# Altium PCB TeensyESC.PcbDoc (part 1 of 2)
Units mil, origin at the board's own origin, x right, y up, seen from the top; angles counter-clockwise.
Board outline 6000 x 4000 mil, 2 copper layers (Top Layer, Bottom Layer); 113 components, 117 nets, 556 pads, 0 vias.
Unrouted connection lines stored in the file: 293.
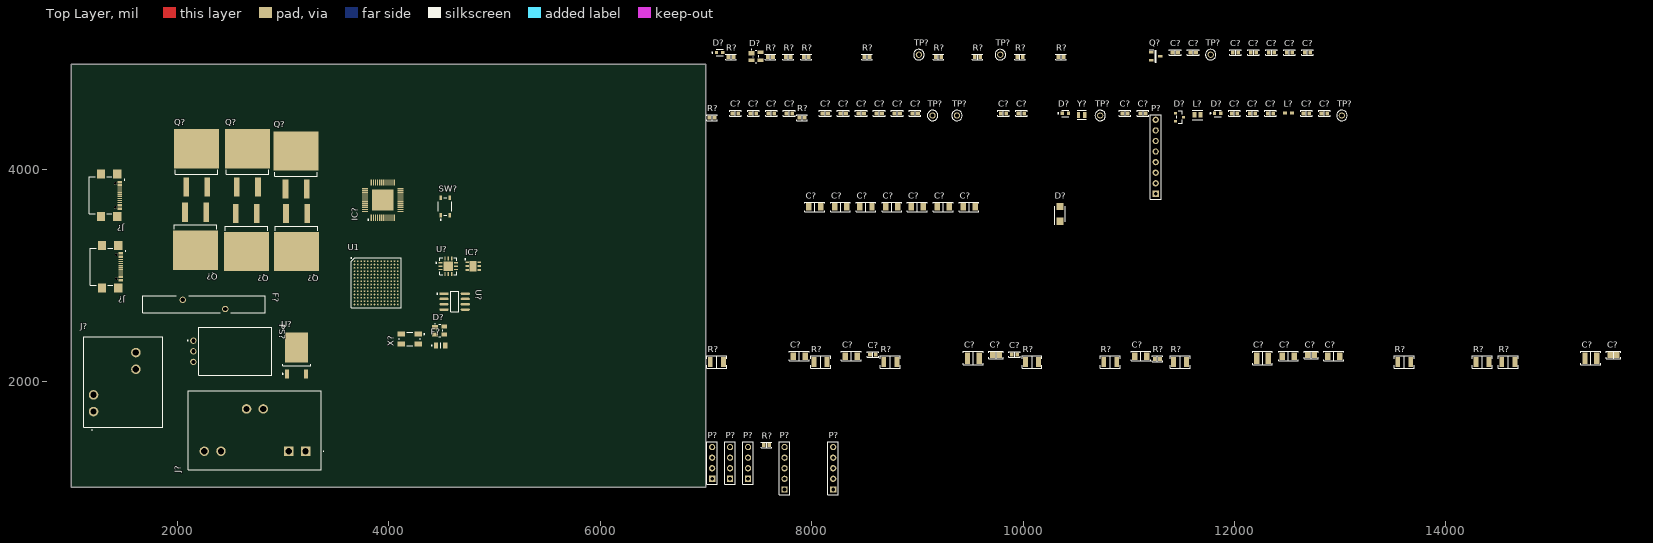
[diagram p0: Top Layer view]
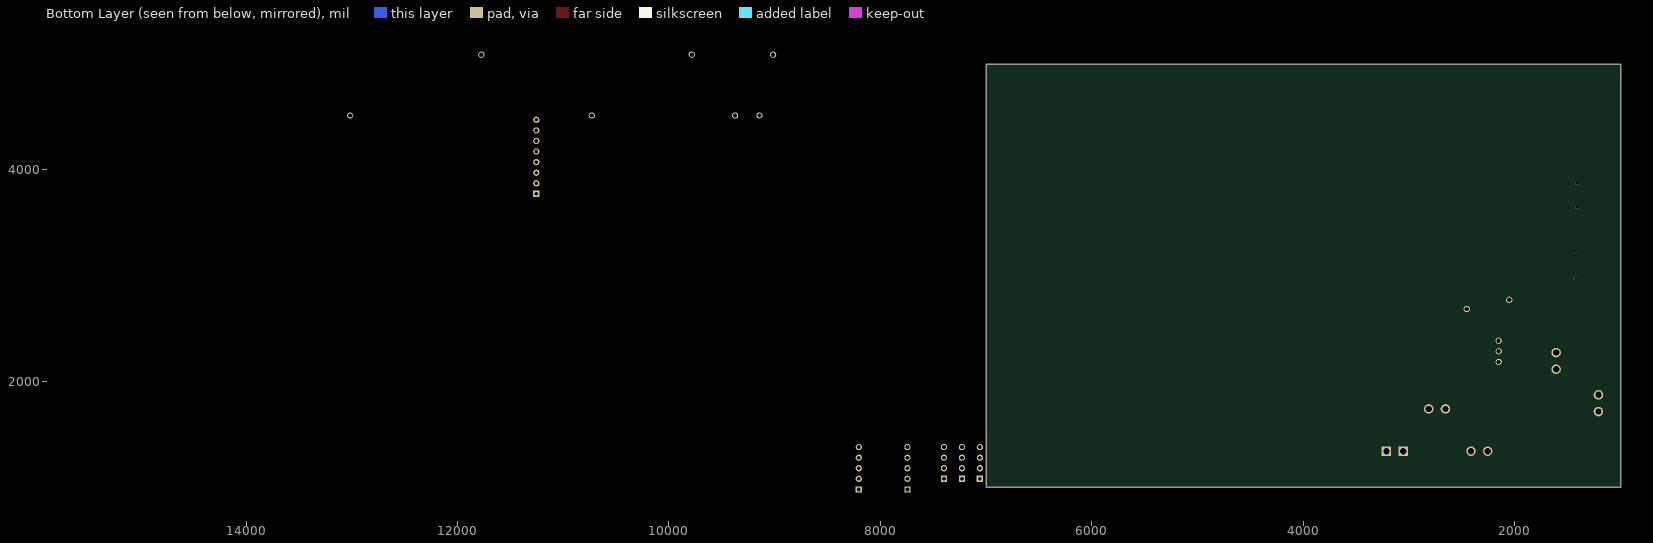
[diagram p1: Bottom Layer view, seen from below]

## Layer stack, top to bottom
Top Solder: solder mask 0.4, Solder Resist, Dk 3.5
Top Layer: signal copper 1.4
Dielectric 1: dielectric 12.6, FR-4, Dk 4.8
Bottom Layer: signal copper 1.4
Bottom Solder: solder mask 0.4, Solder Resist, Dk 3.5

## Board outline
1000,1000 7000,1000 7000,5000 1000,5000

## Design rules (kind name [scope] priority, off if disabled: settings)
Clearance [All] p1: gap=10 ignorepadtopadclearanceinfootprint=FALSE except(0: Arc-Hole Track-Hole SMDPad-Hole THPad-Hole Via-Hole Fill-Hole Poly-Hole Region-Hole Text-Hole)
PolygonConnect [All] p1: connectstyle=Relief reliefconductorwidth=10 reliefentries=4 polygonreliefangle="90 Angle" airgapwidth=10
RoomDefinition U_USBIO [InComponentClass('U_USBIO')] p1: confinementstyle=ConfineIn formatcopy=TRUE lockcomponents=FALSE outline 7045,1120 15660,1120 15660,5250 7045,5250
RoomDefinition U_Gating [InComponentClass('U_Gating')] p2: confinementstyle=ConfineIn formatcopy=TRUE lockcomponents=FALSE outline 7045,1400 15660,1400 15660,5250 7045,5250
RoomDefinition U_MCUCustom [InComponentClass('U_MCUCustom')] p3: confinementstyle=ConfineIn formatcopy=TRUE lockcomponents=FALSE outline 7045,960 15660,960 15660,5250 7045,5250
RoomDefinition U_HVin [InComponentClass('U_HVin')] p4: confinementstyle=ConfineIn formatcopy=TRUE lockcomponents=FALSE outline 7045,1120 15660,1120 15660,5250 7045,5250
RoomDefinition U_EXTIO [InComponentClass('U_EXTIO')] p5: confinementstyle=ConfineIn formatcopy=TRUE lockcomponents=FALSE outline 7000,918.9 14695,918.9 14695,5208.9 7000,5208.9
RoutingVias [All] p1: holewidth=28 width=50 viastyle="Through Hole" minholewidth=28 minwidth=50 maxholewidth=28 maxwidth=50
SolderMaskExpansion [All] p1: expansion=4 istentingtop=FALSE
Width [All] p1: maxlimit=10 minlimit=10 preferedwidth=10
30 further rules are at their usual default settings.

## Classes and differential pairs
component class U_USBIO: C? D? F? IC? J? Q? R? TP? U?
component class U_MCUCustom: C? D? IC? L? P? R? SW? TP? U1 X? Y?
component class U_HVin: C? D? F? J? PS? U?
component class U_Gating: C? IC? Q? R?
component class U_EXTIO: P? R? U?

## Components (designator, comment, footprint, x,y, rotation, side; value= is the part's Value field where it differs from the comment)
C? "100 µF" "CAP 1206_3216 - 0.8MM" 8030,3650 r0 top
C? "10 µF" "CAP 1206_3216 - 0.8MM" 9000,3650 r0 top
C? "1 µF" "CAP 1206_3216 - 0.8MM" 9245,3650 r0 top
C? "0.1 µF" "CAP 0603_1608" 9920,2255 r0 top
C? "10 µF" "CAP 1206_3216 - 0.8MM" 8275,3650 r0 top
C? "0.1 µF" "CAP 1206_3216 - 0.8MM" 8515,3650 r0 top
C? "0.22 µF" "CAP 0603_1608" 12680,4535 r0 top
C? "4.7 µF" "CAP 0603_1608" 7620,4535 r0 top
C? "10 µF" "CAP 0603_1608" 7450,4535 r0 top
C? "1 µF" "CAP 1206_3216 - 0.8MM" 9490,3650 r0 top
C? "100 µF" "CAP 1206_3216 - 0.8MM" 8760,3650 r0 top
C? "1µF" "CAP 1210_3225 - 2.8MM" 15370,2220 r0 top
C? "0.022 µF" "CAP 1206_3216 - 0.8MM" 11115,2240 r0 top
C? "1µF" "CAP 1210_3225 - 2.8MM" 12265,2220 r0 top
C? "0.1 µF" "CAP 1206_3216 - 0.8MM" 12510,2240 r0 top
C? "2.2µF" "CAP 1206_3216 - 1.2MM" 7885,2240 r0 top
C? "0.1 µF" "CAP 1206_3216 - 0.8MM" 12940,2240 r0 top
C? "0.1 µF" "CAP 0603_1608" 8580,2255 r0 top
C? "2.2 µF" "CAP 0805_2012" 15585,2250 r0 top
C? "1µF" "CAP 1210_3225 - 2.8MM" 9530,2220 r0 top
C? "0.1 µF" "CAP 1206_3216 - 0.8MM" 8375,2240 r0 top
C? "2.2 µF" "CAP 0805_2012" 9745,2250 r0 top
C? "2.2 µF" "CAP 0805_2012" 12725,2250 r0 top
C? "9 pF" "CAP 0603_1608" 11135,4535 r0 top
C? "0.22 µF" "CAP 0603_1608" 12350,5110 r0 top
C? "18pF" "CAP 0603_1608" 9815,4535 r0 top
C? "0.22 µF" "CAP 0603_1608" 8810,4535 r0 top
C? "18pF" "CAP 0603_1608" 8980,4535 r0 top
C? "4.7 µF" "CAP 0603_1608" 12690,5110 r0 top
C? "0.22 µF" "CAP 0603_1608" 12180,5110 r0 top
C? "0.22 µF" "CAP 0603_1608" 12010,5110 r0 top
C? "2.2 µF" "CAP 0603_1608" 11440,5110 r0 top
C? "10000 pF" "CAP 0603_1608" 12520,5110 r0 top
C? "2.2 µF" "CAP 0603_1608" 11610,5110 r0 top
C? "4.7 µF" "CAP 0603_1608" 8300,4535 r0 top
C? "0.22 µF" "CAP 0603_1608" 7790,4535 r0 top
C? "10 µF" "CAP 0603_1608" 12850,4535 r0 top
C? "0.22 µF" "CAP 0603_1608" 8470,4535 r0 top
C? "0.22 µF" "CAP 0603_1608" 12000,4535 r0 top
C? "9 pF" "CAP 0603_1608" 9985,4535 r0 top
C? "0.22 µF" "CAP 0603_1608" 8130,4535 r0 top
C? "10 µF" "CAP 0603_1608" 12170,4535 r0 top
C? "0.22 µF" "CAP 0603_1608" 10965,4535 r0 top
C? "4.7 µF" "CAP 0603_1608" 12340,4535 r0 top
C? "10000 pF" "CAP 0603_1608" 7280,4535 r0 top
C? "4.7 µF" "CAP 0603_1608" 8640,4535 r0 top
D? "BAT54C,215" FP-SOT23-MFG 11480,4500 r0 top value=10pF
D? "LTST-C191KGKT" FP-LTST-C191KGKT-MFG 11840,4535 r0 top
D? "RB050LAM-30TFTR" SODFL4725X95N 10350,3585 r90 top
D? "LTST-C191KGKT" FP-LTST-C191KGKT-MFG 10400,4535 r0 top
D? "LTST-C191KGKT" FP-LTST-C191KGKT-MFG 7130,5110 r0 top
D? "SP0503BAHTG" LFUS-SOT143-4_V 4483.31,2482.4 r0 top
D? "SP0503BAHTG" LFUS-SOT143-4_V 7475,5075 r0 top
F? "0ZRM0375FF1A" 0ZRM0375FF1A 2053.43,2771.61 r0 top
F? "0805L110SLYR" 0805L075SLYR 4492.31,2339.03 r0 top
IC? "TMC6200-TA" QFP50P900X900X120-49N 3945,3715 r90 top
IC? "NCP692MN33T2G" SON95P300X300X100-7N 4800,3090 r0 top
J? "0399100103" 0399100103 3214.8,1340 r180 top
J? "0399100102" 0399100102 1210,1715 r90 top
J? "USB4110-GF-A_REVB" GCT_USB4110-GF-A_REVB 1415,3760 r270 top
J? "USB4110-GF-A_REVB" GCT_USB4110-GF-A_REVB 1425,3085 r270 top
L? "BLM18AG121SN1D" MURA-BLM18-F-H1-CHIP-2_V 12510,4540 r0 top
L? "LQM21PN4R7MGRD" FP-LQM21PH_G0-IPC_C 11650,4520 r0 top
P? "Header 4" HDR1X4 7230,1078.9 r90 top
P? "Header 5" HDR1X5 7745,978.9 r90 top
P? "Header 4" HDR1X4 7400,1078.9 r90 top
P? "Header 8" HDR1X8 11255,3773.9 r90 top
P? "Header 5" HDR1X5 8205,978.9 r90 top
P? "Header 4" HDR1X4 7060,1078.9 r90 top
PS? "V7812W-500R" V78121000R 2510,2285 r0 top
Q? "IPB031N08N5ATMA1" FP-PG-TO263-3-MFG 2175,3372.87 r180 top
Q? "IPB031N08N5ATMA1" FP-PG-TO263-3-MFG 2185,4067.13 r0 top
Q? "IPB031N08N5ATMA1" FP-PG-TO263-3-MFG 2655,3360 r180 top
Q? "IPB031N08N5ATMA1" FP-PG-TO263-3-MFG 3130,3360 r180 top
Q? "DMP3125L-7" SOT96P240X110-3N 11255,5075 r0 top
Q? "IPB031N08N5ATMA1" FP-PG-TO263-3-MFG 2665,4067.13 r0 top
Q? "IPB031N08N5ATMA1" FP-PG-TO263-3-MFG 3125,4047.13 r0 top
R? "1 Ohms" "RES 1210_3225" 14590,2183.9 r0 top
R? "1 Ohms" "RES 1210_3225" 10085,2183.9 r0 top
R? "10 Ohms" "RES 1210_3225" 14345,2183.9 r0 top
R? "1 Ohms" "RES 1210_3225" 11485,2183.9 r0 top
R? "10 Ohms" "RES 1210_3225" 10825,2183.9 r0 top
R? "120 Ohms" "RES 0603_1608" 7575,1398.9 r0 top
R? "10 Ohms" "RES 0603_1608" 11270,2213.9 r0 top
R? "1 Ohms" "RES 1210_3225" 13605,2183.9 r0 top
R? "10 Ohms" "RES 1210_3225" 8085,2183.9 r0 top
R? "1 Ohms" "RES 1210_3225" 7105,2183.9 r0 top
R? "100 kOhms" "RES 0603_1608" 7780,5068.9 r0 top
R? "56 kOhms" "RES 0603_1608" 7950,5068.9 r0 top
R? "5.1 kOhms" "RES 0603_1608" 9970,5068.9 r0 top
R? "100 kOhms" "RES 0603_1608" 9200,5068.9 r0 top
R? "5.1 kOhms" "RES 0603_1608" 10360,5068.9 r0 top
R? "16 kOhms" "RES 0603_1608" 8525,5068.9 r0 top
R? "100 kOhms" "RES 0603_1608" 7910,4493.9 r0 top
R? "2.2 MOhms" "RES 0603_1608" 7060,4493.9 r0 top
R? "1 Ohms" "RES 1210_3225" 8745,2183.9 r0 top
R? "56 kOhms" "RES 0603_1608" 7610,5068.9 r0 top
R? "16 kOhms" "RES 0603_1608" 7240,5068.9 r0 top
R? "100 kOhms" "RES 0603_1608" 9570,5068.9 r0 top
SW? "PTS810 SJG 250 SMTR LFS" FP-PTS810_SJG_250_SMTR_LF-MFG 4535,3655 r90 top
TP? "5003" KSTN-5003 9145,4515 r0 top
TP? "5003" KSTN-5003 10730,4515 r0 top
TP? "5003" KSTN-5003 13015,4515 r0 top
TP? "5003" KSTN-5003 9375,4515 r0 top
TP? "5003" KSTN-5003 9785,5090 r0 top
TP? "5003" KSTN-5003 11775,5090 r0 top
TP? "5003" KSTN-5003 9015,5090 r0 top
U1 "MIMXRT1062DVJ6B" BGA196C80P14X14_1200X1200X152 3882.76,2932.24 r0 top
U? "TJA1050T/CM,118" FP-SOT96-1-IPC_A 4625,2755 r0 top
U? "LP38690DT-5.0/NOPB" NDP0003B_M 3130.14,2243.9 r90 top
U? "MAX1563ETC+" FP-T1244-4-MFG 4565,3090 r0 top
X? "ABM3B-24.000MHZ-B2-T" ABRA-ABM3B-4_V 4200,2400 r180 top
Y? "ABS06-32.768KHZ-9-1-T" FP-ABS06-MFG 10555,4520 r0 top

## Footprints (in the part's own frame and the unit in brackets; to place one, negate y for a bottom-side part, rotate by r counter-clockwise, add the part's x,y. Pads: shape width x height; smd on the part's side, far side on the other; paste and mask are expansions set on the pad)
0ZRM0375FF1A [mm]
  round 1.515 hole 1.01: 1(0,0) 2(10.2,-2.2)
  silkscreen extent -9.65,-3.15 19.85,0.95, body extent -9.65,-3.15 19.85,0.95, height 34.1
0805L075SLYR [mm]
  rect 1x1.5 smd: 1(-1.1,0) 2(1.1,0)
  silkscreen extent -2.2,-0.67 0,0.67, body extent -1.05,-0.68 1.05,0.68, height 0.75
0399100102 [mm]
  round 2.28 hole 1.52: 1(0,0) 2(4.01,0) 3(10.16,-10.16) 4(14.17,-10.16)
  silkscreen extent -4.51,-16.61 17.99,2.39, body extent -3.82,-16.61 17.99,2.39, height 29.8
0399100103 [mm]
  rect 2.28x2.28 hole 1.52: A1(0,0) B1(4.01,0)
  round 2.28 hole 1.52: A2(10.155,-10.16) A3(20.315,0) B2(14.17,-10.16) B3(24.325,0)
  silkscreen extent -4.4,-14.58 28.21,4.42, body extent -3.79,-14.58 28.21,4.42, height 30.1
ABRA-ABM3B-4_V [mm] "SMD, 4-Leads, Body 5x3.2mm"
  rect 1.8x1.2 smd: 1(-2,-1.2) 2(2,-1.2) 3(2,1.2) 4(-2,1.2)
  silkscreen extent -3.58,-1.6 2.5,1.6, body extent -2.5,-1.59 2.5,1.59, height 1.13
BGA196C80P14X14_1200X1200X152 [mm]
  round 0.394 smd: A1(-5.2,5.2) A2(-4.4,5.2) A3(-3.6,5.2) A4(-2.8,5.2) A5(-2,5.2) A6(-1.2,5.2) A7(-0.4,5.2) A8(0.4,5.2) A9(1.2,5.2) A10(2,5.2) A11(2.8,5.2) A12(3.6,5.2) A13(4.4,5.2) A14(5.2,5.2) B1(-5.2,4.4) B2(-4.4,4.4) B3(-3.6,4.4) B4(-2.8,4.4) B5(-2,4.4) B6(-1.2,4.4) B7(-0.4,4.4) B8(0.4,4.4) B9(1.2,4.4) B10(2,4.4) B11(2.8,4.4) B12(3.6,4.4) B13(4.4,4.4) B14(5.2,4.4) C1(-5.2,3.6) C2(-4.4,3.6) C3(-3.6,3.6) C4(-2.8,3.6) C5(-2,3.6) C6(-1.2,3.6) C7(-0.4,3.6) C8(0.4,3.6) C9(1.2,3.6) C10(2,3.6) C11(2.8,3.6) C12(3.6,3.6) C13(4.4,3.6) C14(5.2,3.6) D1(-5.2,2.8) D2(-4.4,2.8) D3(-3.6,2.8) D4(-2.8,2.8) D5(-2,2.8) D6(-1.2,2.8) D7(-0.4,2.8) D8(0.4,2.8) D9(1.2,2.8) D10(2,2.8) D11(2.8,2.8) D12(3.6,2.8) D13(4.4,2.8) D14(5.2,2.8) E1(-5.2,2) E2(-4.4,2) E3(-3.6,2) E4(-2.8,2) E5(-2,2) E6(-1.2,2) E7(-0.4,2) E8(0.4,2) E9(1.2,2) E10(2,2) E11(2.8,2) E12(3.6,2) E13(4.4,2) E14(5.2,2) F1(-5.2,1.2) F2(-4.4,1.2) F3(-3.6,1.2) F4(-2.8,1.2) F5(-2,1.2) F6(-1.2,1.2) F7(-0.4,1.2) F8(0.4,1.2) F9(1.2,1.2) F10(2,1.2) F11(2.8,1.2) F12(3.6,1.2) F13(4.4,1.2) F14(5.2,1.2) G1(-5.2,0.4) G2(-4.4,0.4) G3(-3.6,0.4) G4(-2.8,0.4) G5(-2,0.4) G6(-1.2,0.4) G7(-0.4,0.4) G8(0.4,0.4) G9(1.2,0.4) G10(2,0.4) G11(2.8,0.4) G12(3.6,0.4) G13(4.4,0.4) G14(5.2,0.4) H1(-5.2,-0.4) H2(-4.4,-0.4) H3(-3.6,-0.4) H4(-2.8,-0.4) H5(-2,-0.4) H6(-1.2,-0.4) H7(-0.4,-0.4) H8(0.4,-0.4) H9(1.2,-0.4) H10(2,-0.4) H11(2.8,-0.4) H12(3.6,-0.4) H13(4.4,-0.4) H14(5.2,-0.4) J1(-5.2,-1.2) J2(-4.4,-1.2) J3(-3.6,-1.2) J4(-2.8,-1.2) J5(-2,-1.2) J6(-1.2,-1.2) J7(-0.4,-1.2) J8(0.4,-1.2) J9(1.2,-1.2) J10(2,-1.2) J11(2.8,-1.2) J12(3.6,-1.2) J13(4.4,-1.2) J14(5.2,-1.2) K1(-5.2,-2) K2(-4.4,-2) K3(-3.6,-2) K4(-2.8,-2) K5(-2,-2) K6(-1.2,-2) K7(-0.4,-2) K8(0.4,-2) K9(1.2,-2) K10(2,-2) K11(2.8,-2) K12(3.6,-2) K13(4.4,-2) K14(5.2,-2) L1(-5.2,-2.8) L2(-4.4,-2.8) L3(-3.6,-2.8) L4(-2.8,-2.8) L5(-2,-2.8) L6(-1.2,-2.8) L7(-0.4,-2.8) L8(0.4,-2.8) L9(1.2,-2.8) L10(2,-2.8) L11(2.8,-2.8) L12(3.6,-2.8) L13(4.4,-2.8) L14(5.2,-2.8) M1(-5.2,-3.6) M2(-4.4,-3.6) M3(-3.6,-3.6) M4(-2.8,-3.6) M5(-2,-3.6) M6(-1.2,-3.6) M7(-0.4,-3.6) M8(0.4,-3.6) M9(1.2,-3.6) M10(2,-3.6) M11(2.8,-3.6) M12(3.6,-3.6) M13(4.4,-3.6) M14(5.2,-3.6) N1(-5.2,-4.4) N2(-4.4,-4.4) N3(-3.6,-4.4) N4(-2.8,-4.4) N5(-2,-4.4) N6(-1.2,-4.4) N7(-0.4,-4.4) N8(0.4,-4.4) N9(1.2,-4.4) N10(2,-4.4) N11(2.8,-4.4) N12(3.6,-4.4) N13(4.4,-4.4) N14(5.2,-4.4) P1(-5.2,-5.2) P2(-4.4,-5.2) P3(-3.6,-5.2) P4(-2.8,-5.2) P5(-2,-5.2) P6(-1.2,-5.2) P7(-0.4,-5.2) P8(0.4,-5.2) P9(1.2,-5.2) P10(2,-5.2) P11(2.8,-5.2) P12(3.6,-5.2) P13(4.4,-5.2) P14(5.2,-5.2)
  silkscreen extent -6.1,-6 6,6.1, body extent -6,-6 6,6, height 1.52
"CAP 0603_1608" [mm] "Chip Capacitor, 2-Leads, Body 1.60x0.80mm, IPC Medium Density"
  rect 0.9x1 smd: 1(-0.675,0) 2(0.675,0)
  silkscreen extent -1.4,-0.7 1.4,0.7, body extent -0.8,-0.41 0.8,0.41, height 0.82
"CAP 0805_2012" [mm] "Chip Capacitor, 2-Leads, Body 2.00x1.20mm, IPC Medium Density"
  rect 1.3x1.4 smd: 1(-0.8,0) 2(0.8,0)
  silkscreen extent -1.7,-0.9 1.7,0.9, body extent -1,-0.64 1,0.64, height 1.26
"CAP 1206_3216 - 0.8MM" [mm] "Chip Capacitor, 2-Leads, Body 3.25x1.60mm, IPC Medium Density"
  rect 1.3x1.8 smd: 1(-1.45,0) 2(1.45,0)
  silkscreen extent -2.37,-1.12 2.37,1.12, body extent -1.6,-0.8 1.6,0.8, height 0.8
"CAP 1206_3216 - 1.2MM" [mm] "Chip Capacitor, 2-Leads, Body 3.25x1.60mm, IPC Medium Density"
  rect 1.3x1.8 smd: 1(-1.45,0) 2(1.45,0)
  silkscreen extent -2.37,-1.12 2.37,1.12, body extent -1.6,-0.8 1.6,0.8, height 1.2
"CAP 1210_3225 - 2.8MM" [mm] "Chip Capacitor, 2-Leads, Body 3.20x2.50mm, IPC Medium Density"
  rect 1.3x2.7 smd: 1(-1.4,0) 2(1.4,0)
  silkscreen extent -2.37,-1.63 2.37,1.63, body extent -1.6,-1.25 1.6,1.25, height 2.8
FP-ABS06-MFG [mm]
  rect 0.75x1.4 smd paste+0 mask+0: 1(-0.725,0) 2(0.725,0)
  silkscreen extent -1.07,-1.07 1.07,1.07, body extent -1.2,-0.8 1.2,0.8, height 0.25
FP-LQM21PH_G0-IPC_C [mil]
  rect 39.61x51.5 smd paste+0 mask+0: 1(-28.59,0) 2(28.59,0)
  silkscreen extent -48,-43 48,43, body extent -52,-31 52,31, height 10
FP-LTST-C191KGKT-MFG [mm]
  rect 0.8x0.8 smd paste+0 mask+0: 1(-0.75,0) 2(0.75,0)
  silkscreen extent -1.82,-0.77 0.85,0.77, body extent -1.25,-0.55 1.25,0.55, height 0.25
FP-PG-TO263-3-MFG [mm]
  rect 1.35x4.6 smd paste-1000 mask+0: 1(-2.54,-5.775) 3(2.54,-5.775)
  rect 10.8x9.4 smd paste-1000 mask+0: 4(0,3.375)
  silkscreen extent -5.1,-2.73 5.1,-1.7, body extent -5.5,-8.18 5.5,8.18, height 0.25
FP-PTS810_SJG_250_SMTR_LF-MFG [mm]
  rect 1.05x0.65 smd paste+0 mask+0: 1(-2.075,1.075) 2(2.075,1.075) 3(-2.075,-1.075) 4(2.075,-1.075)
  silkscreen extent -3.32,-1.6 2.1,1.6, body extent -2.7,-1.7 2.7,1.7, height 0.25
FP-SOT23-MFG [mm]
  rect 0.7x0.6 smd paste-1000 mask+0: 1(-1,0.95) 2(-1,-0.95) 3(1,0)
  silkscreen extent -0.7,-1.5 0.7,1.5, body extent -1.5,-1.65 1.5,1.65, height 0.25
FP-SOT96-1-IPC_A [mil]
  rect 86.79x23.94 smd paste+0 mask+0: 1(-100.43,75)
  rrect100% 86.79x23.94 smd paste+0 mask+0: 2(-100.43,25) 3(-100.43,-25) 4(-100.43,-75) 5(100.43,-75) 6(100.43,-25) 7(100.43,25) 8(100.43,75)
  silkscreen extent -170,-96 37,96, body extent -164,-116 164,116, height 10
FP-T1244-4-MFG [mm]
  rect 0.95x0.35 smd paste+0 mask+0: 1(-1.84,0.8) 2(-1.84,0) 3(-1.84,-0.8) 7(1.84,-0.8) 8(1.84,0) 9(1.84,0.8)
  rect 0.35x0.95 smd paste+0 mask+0: 4(-0.8,-1.84) 5(0,-1.84) 6(0.8,-1.84) 10(0.8,1.84) 11(0,1.84) 12(-0.8,1.84)
  rect 2.23x2.23 smd paste+0 mask+0: 13(0,0)
  silkscreen extent -3.05,-2.05 2.05,2.05, body extent -2.41,-2.41 2.41,2.41, height 0.25
GCT_USB4110-GF-A_REVB [mm]
  rect 0.6x1.15 smd: A1/B12(-3.2,1.075) A4/B9(-2.4,1.075) B1/A12(3.2,1.075) B4/A9(2.4,1.075)
  rect 0.3x1.15 smd: A5(-1.25,1.075) A6(-0.25,1.075) A7(0.25,1.075) A8(1.25,1.075) B5(1.75,1.075) B6(0.75,1.075) B7(-0.75,1.075) B8(-1.75,1.075)
  rect 2.18x2 smd: S1(-5.11,0.5) S2(5.11,0.5) S3(-5.11,-3.43) S4(5.11,-3.43)
  round 0.65 hole 0.65 unplated: ""(-2.89,0) ""(2.89,0)
  silkscreen extent -4.47,-6.28 4.47,2.33, body extent -5.65,-6.28 5.65,1.42, height 3.26
HDR1X4 [mm] "Connector; Header; 4 Position"
  rect 1.5x1.5 hole 0.9: 1(0,0)
  round 1.5 hole 0.9: 2(2.54,0) 3(5.08,0) 4(7.62,0)
  silkscreen extent -1.27,-1.27 8.89,1.27
HDR1X5 [mm] "Connector; Header; 5 Position"
  rect 1.5x1.5 hole 0.9: 1(0,0)
  round 1.5 hole 0.9: 2(2.54,0) 3(5.08,0) 4(7.62,0) 5(10.16,0)
  silkscreen extent -1.27,-1.27 11.43,1.27
HDR1X8 [mm] "Connector; Header; 8 Position"
  rect 1.5x1.5 hole 0.9: 1(0,0)
  round 1.5 hole 0.9: 2(2.54,0) 3(5.08,0) 4(7.62,0) 5(10.16,0) 6(12.7,0) 7(15.24,0) 8(17.78,0)
  silkscreen extent -1.27,-1.27 19.05,1.27
KSTN-5003 [mm] "Test Point, Through Hole, Dia 2.54mm"
  round 1.5 hole 1: 1(0,0)
  silkscreen extent -1.27,-1.27 1.27,1.27, body extent -1.27,-1.27 1.27,1.27, height 4.57
LFUS-SOT143-4_V [mm] "SOT143, 4-Leads, Body 3.04x1.4mm, Pitch 1.90mm"
  rect 1.4x1.1 smd: 1(-1.1,0.75)
  rect 1.4x0.9 smd: 2(-1.1,-0.95) 3(1.1,-0.95) 4(1.1,0.95)
  silkscreen extent -1.15,-1.5 0.7,1.65, body extent -0.7,-1.52 0.7,1.52, height 1.22
MURA-BLM18-F-H1-CHIP-2_V [mm] "Chip Ferrite Bead, 2-Leads, Body 1.6x0.8mm, Height 0.95mm, Flow"
  rect 0.95x0.7 smd: 1(-0.825,0) 2(0.825,0)
  body extent -0.87,-0.48 0.87,0.48, height 0.95
NDP0003B_M [mm] "D-PAK, 4-Leads, Body 6.1x6.6mm, Pitch 2.29mm, Lead Span 9.7mm, IPC Low Density"
  rrect10% 2.2x1 smd: 1(-4.4,2.28) 3(-4.4,-2.28)
  rrect2% 7.2x5.55 smd: 4(1.9,0)
  silkscreen extent -4.52,-3.35 -2.1,3.45, body extent -2.45,-3.35 3.75,3.35, height 2.38
QFP50P900X900X120-49N [mm]
  rect 1.475x0.3 smd: 1(-4.238,2.75) 2(-4.238,2.25) 3(-4.238,1.75) 4(-4.238,1.25) 5(-4.238,0.75) 6(-4.238,0.25) 7(-4.238,-0.25) 8(-4.238,-0.75) 9(-4.238,-1.25) 10(-4.238,-1.75) 11(-4.238,-2.25) 12(-4.238,-2.75) 25(4.238,-2.75) 26(4.238,-2.25) 27(4.238,-1.75) 28(4.238,-1.25) 29(4.238,-0.75) 30(4.238,-0.25) 31(4.238,0.25) 32(4.238,0.75) 33(4.238,1.25) 34(4.238,1.75) 35(4.238,2.25) 36(4.238,2.75)
  rect 0.3x1.475 smd: 13(-2.75,-4.238) 14(-2.25,-4.238) 15(-1.75,-4.238) 16(-1.25,-4.238) 17(-0.75,-4.238) 18(-0.25,-4.238) 19(0.25,-4.238) 20(0.75,-4.238) 21(1.25,-4.238) 22(1.75,-4.238) 23(2.25,-4.238) 24(2.75,-4.238) 37(2.75,4.238) 38(2.25,4.238) 39(1.75,4.238) 40(1.25,4.238) 41(0.75,4.238) 42(0.25,4.238) 43(-0.25,4.238) 44(-0.75,4.238) 45(-1.25,4.238) 46(-1.75,4.238) 47(-2.25,4.238) 48(-2.75,4.238)
  rect 5.1x5.1 smd: 49(0,0)
  silkscreen extent -4.85,3.37 -4.6,3.62, body extent -4.5,-4.5 4.5,4.5, height 1.2
"RES 0603_1608" [mm] "Chip Resistor, 2-Leads, Body 1.60x0.80mm, IPC Medium Density"
  rect 0.85x0.95 smd: 1(-0.65,0) 2(0.65,0)
  silkscreen extent -1.27,-0.7 1.27,0.7, body extent -0.8,-0.4 0.8,0.4, height 0.45
"RES 1210_3225" [mm] "Chip Resistor, 2-Leads, Body 3.1x2.6mm, IPC Medium Density"
  rect 1.15x2.5 smd: 1(-1.575,0) 2(1.575,0)
  silkscreen extent -2.4,-1.5 2.4,1.5, body extent -1.6,-1.25 1.6,1.25, height 0.7
SODFL4725X95N [mm]
  rect 1.77x1.72 smd: 1(-1.75,0) 2(1.75,0)
  silkscreen extent -2.64,-1.25 1.85,1.25, body extent -2.35,-1.25 2.35,1.25, height 0.95
SON95P300X300X100-7N [mm]
  rect 0.85x0.45 smd: 1(-1.45,0.95) 2(-1.45,0) 3(-1.45,-0.95) 4(1.45,-0.95) 5(1.45,0) 6(1.45,0.95)
  rect 1.7x2.6 smd: 7(0,0)
  silkscreen extent -2,1.55 -1.75,1.8, body extent -1.55,-1.5 1.55,1.5, height 1
SOT96P240X110-3N [mm]
  rect 1.1x0.65 smd: 1(-1.05,0.96) 2(-1.05,-0.96) 3(1.05,0)
  silkscreen extent -1.6,-1.45 0.15,1.54, body extent -1.2,-1.45 1.2,1.45, height 1.1
V78121000R [mm]
  round 1.5 hole 1: 1(-9.05,2.54) 2(-9.05,0) 3(-9.05,-2.54)
  silkscreen extent -10.52,-5.75 9.8,5.75, body extent -9.45,-5.75 9.8,5.75, height 9.1

## Part data
C? C?: library part C3216X5R0J107M160AB, "CAP CER 100UF 6.3V X5R 1206", Device Package="1206 (3216 Metric)", manufacturer="TDK Corporation", Operating Temperature="-55°C ~ 85°C", Supplier Part Number 1=445-6008-1-ND, Temperature Coefficient=X5R, Tolerance=±20%, Voltage - Rated=6.3V, Applications="General Purpose", Capacitance="100 µF", componentlink1description=Datasheet, componentlink1url=https://product.tdk.com/info/en/catalog/datasheets/mlcc_commercial_general_en.pdf?ref_disty=digikey, componentlink2description="DigiKey Link", componentlink2url=https://www.digikey.com/en/products/detail/tdk-corporation/C3216X5R0J107M160AB/2443486, Features="Low ESL", lastupdated="2/6/2023 8:14:29 PM", Lifecycle Status=Active, Minimum Order=1, Mounting Type="Surface Mount, MLCC", Package / Case="1206 (3216 Metric)", packaging=TapeAndReel, Part Number=C3216X5R0J107M160AB, Part Status=Active, partid=21199, price=0.29, series=C, Size / Dimension="0.126\" L x 0.063\" W (3.20mm x 1.60mm)", Supplier 1=DigiKey, Thickness (Max)="0.075\" (1.90mm)"
C? C?: library part GRM31CR71E106KA12K, "CAP CER 10UF 25V X7R 1206", Device Package="1206 (3216 Metric)", manufacturer="Murata Electronics", Operating Temperature="-55°C ~ 125°C", Supplier Part Number 1=490-14678-1-ND, Temperature Coefficient=X7R, Tolerance=±10%, Voltage - Rated=25V, Applications="General Purpose", Capacitance="10 µF", componentlink1description=Datasheet, componentlink1url=https://search.murata.co.jp/Ceramy/image/img/A01X/G101/ENG/GRM31CR71E106KA12-01.pdf, componentlink2description="DigiKey Link", componentlink2url=https://www.digikey.com/en/products/detail/murata-electronics/GRM31CR71E106KA12K/4905618, lastupdated="2/6/2023 8:14:40 PM", Lifecycle Status=Active, Minimum Order=1, Mounting Type="Surface Mount, MLCC", Package / Case="1206 (3216 Metric)", packaging=TapeAndReel, Part Number=GRM31CR71E106KA12K, Part Status=Active, partid=19493, price=0.06, series=GRM, Size / Dimension="0.126\" L x 0.063\" W (3.20mm x 1.60mm)", Supplier 1=DigiKey, Thickness (Max)="0.071\" (1.80mm)"
C? C?: library part CC1206KKX7R8BB105, "CAP CER 1UF 25V X7R 1206", Device Package="1206 (3216 Metric)", manufacturer=Yageo, Operating Temperature="-55°C ~ 125°C", Supplier Part Number 1=311-1356-1-ND, Temperature Coefficient=X7R, Tolerance=±10%, Voltage - Rated=25V, Applications="General Purpose", Capacitance="1 µF", componentlink1description=Datasheet, componentlink1url=https://www.yageo.com/upload/media/product/productsearch/datasheet/mlcc/UPY-GPHC_X7R_6.3V-to-50V_18.pdf, componentlink2description="DigiKey Link", componentlink2url=https://www.digikey.com/en/products/detail/yageo/CC1206KKX7R8BB105/2103094, lastupdated="2/6/2023 8:14:35 PM", Lifecycle Status=Active, Minimum Order=1, Mounting Type="Surface Mount, MLCC", Package / Case="1206 (3216 Metric)", packaging=TapeAndReel, Part Number=CC1206KKX7R8BB105, Part Status=Active, partid=18923, price=0.03, series=CC, Size / Dimension="0.126\" L x 0.063\" W (3.20mm x 1.60mm)", Supplier 1=DigiKey, Thickness (Max)="0.045\" (1.15mm)"
C? C?: library part CS0603KRX7R7BB104, "CAP CER 0.1UF 16V X7R 0603", Device Package="0603 (1608 Metric)", manufacturer=Yageo, Operating Temperature="-55°C ~ 125°C", Supplier Part Number 1=311-3560-1-ND, Temperature Coefficient=X7R, Tolerance=±10%, Voltage - Rated=16V, Applications="Boardflex Sensitive", Capacitance="0.1 µF", componentlink1description=Datasheet, componentlink1url=http://www.yageo.com/NewPortal/yageodocoutput?fileName=/pdf/MLCC/UPY-ST_NPOX7R_16V-to-3KV_5.pdf, componentlink2description="DigiKey Link", componentlink2url=https://www.digikey.com/en/products/detail/yageo/CS0603KRX7R7BB104/6097897, Features="Soft Termination", lastupdated="2/6/2023 8:08:52 PM", Lifecycle Status=Active, Minimum Order=1, Mounting Type="Surface Mount, MLCC", Package / Case="0603 (1608 Metric)", packaging=TapeAndReel, Part Number=CS0603KRX7R7BB104, Part Status=Active, partid=2286, price=0.01, series=CS, Size / Dimension="0.063\" L x 0.031\" W (1.60mm x 0.80mm)", Supplier 1=DigiKey, Thickness (Max)="0.037\" (0.95mm)"
C? C? C? C?: library part CC1206MRY5V9BB104, "CAP CER 0.1UF 50V Y5V 1206", Device Package="1206 (3216 Metric)", manufacturer=Yageo, Operating Temperature="-30°C ~ 85°C", Supplier Part Number 1=311-4504-1-ND, Temperature Coefficient="Y5V (F)", Tolerance=±20%, Voltage - Rated=50V, Applications="General Purpose", Capacitance="0.1 µF", componentlink1description=Datasheet, componentlink1url=http://www.yageo.com/documents/recent/UPY-GPHC_Y5V_6.3V-to-50V_8.pdf, componentlink2description="DigiKey Link", componentlink2url=https://www.digikey.com/en/products/detail/yageo/CC1206MRY5V9BB104/5884674, lastupdated="2/6/2023 8:14:35 PM", Lifecycle Status=Active, Minimum Order=1, Mounting Type="Surface Mount, MLCC", Package / Case="1206 (3216 Metric)", packaging=TapeAndReel, Part Number=CC1206MRY5V9BB104, Part Status=Active, partid=18711, price=0.05, series=CC, Size / Dimension="0.126\" L x 0.063\" W (3.20mm x 1.60mm)", Supplier 1=DigiKey, Thickness (Max)="0.028\" (0.70mm)"
C? C? C? C? C? C? C? C? C? C?: library part CC0603KRX7R8BB224, "CAP CER 0.22UF 25V X7R 0603", Device Package="0603 (1608 Metric)", manufacturer=Yageo, Operating Temperature="-55°C ~ 125°C", Supplier Part Number 1=311-1803-1-ND, Temperature Coefficient=X7R, Tolerance=±10%, Voltage - Rated=25V, Applications="General Purpose", Capacitance="0.22 µF", componentlink1description=Datasheet, componentlink1url=https://www.yageo.com/upload/media/product/productsearch/datasheet/mlcc/UPY-GPHC_X7R_6.3V-to-50V_18.pdf, componentlink2description="DigiKey Link", componentlink2url=https://www.digikey.com/en/products/detail/yageo/CC0603KRX7R8BB224/5195211, lastupdated="2/6/2023 8:08:53 PM", Lifecycle Status=Active, Minimum Order=1, Mounting Type="Surface Mount, MLCC", Package / Case="0603 (1608 Metric)", packaging=TapeAndReel, Part Number=CC0603KRX7R8BB224, Part Status=Active, partid=2214, price=0.01, series=CC, Size / Dimension="0.063\" L x 0.031\" W (1.60mm x 0.80mm)", Supplier 1=DigiKey, Thickness (Max)="0.035\" (0.90mm)"
C? C? C? C? C?: library part GRM188R61C475KE11D, "CAP CER 4.7UF 16V X5R 0603", Device Package="0603 (1608 Metric)", manufacturer="Murata Electronics", Operating Temperature="-55°C ~ 85°C", Supplier Part Number 1=490-10730-1-ND, Temperature Coefficient=X5R, Tolerance=±10%, Voltage - Rated=16V, Applications="General Purpose", Capacitance="4.7 µF", componentlink1description=Datasheet, componentlink1url=https://search.murata.co.jp/Ceramy/image/img/A01X/G101/ENG/GRM188R61C475KE11-01.pdf, componentlink2description="DigiKey Link", componentlink2url=https://www.digikey.com/en/products/detail/murata-electronics/GRM188R61C475KE11D/4905341, lastupdated="2/6/2023 8:08:52 PM", Lifecycle Status=Active, Minimum Order=1, Mounting Type="Surface Mount, MLCC", Package / Case="0603 (1608 Metric)", packaging=TapeAndReel, Part Number=GRM188R61C475KE11D, Part Status=Active, partid=2388, price=0.03, series=GRM, Size / Dimension="0.063\" L x 0.031\" W (1.60mm x 0.80mm)", Supplier 1=DigiKey, Thickness (Max)="0.037\" (0.95mm)"
C? C? C?: library part GRM188R60G106ME47D, "CAP CER 10UF 4V X5R 0603", Device Package="0603 (1608 Metric)", manufacturer="Murata Electronics", Operating Temperature="-55°C ~ 85°C", Supplier Part Number 1=490-3298-1-ND, Temperature Coefficient=X5R, Tolerance=±20%, Voltage - Rated=4V, Applications="General Purpose", Capacitance="10 µF", componentlink1description=Datasheet, componentlink1url=https://www.murata.com/~/media/webrenewal/support/library/catalog/products/capacitor/mlcc/c02e.ashx?la=en-us, componentlink2description="DigiKey Link", componentlink2url=https://www.digikey.com/en/products/detail/murata-electronics/GRM188R60G106ME47D/702562, lastupdated="2/6/2023 8:08:52 PM", Lifecycle Status=Active, Minimum Order=1, Mounting Type="Surface Mount, MLCC", Package / Case="0603 (1608 Metric)", packaging=TapeAndReel, Part Number=GRM188R60G106ME47D, Part Status=Active, partid=2393, price=0.01, series=GRM, Size / Dimension="0.063\" L x 0.031\" W (1.60mm x 0.80mm)", Supplier 1=DigiKey, Thickness (Max)="0.035\" (0.90mm)"
C? C? C?: library part 12101C105MAT2A, "CAP CER 1UF 100V X7R 1210", Device Package="1210 (3225 Metric)", manufacturer="AVX Corporation", Operating Temperature="-55°C ~ 125°C", Supplier Part Number 1=478-2571-1-ND, Temperature Coefficient=X7R, Tolerance=±20%, Voltage - Rated=100V, Applications="General Purpose", Capacitance=1µF, componentlink1description=Datasheet, componentlink1url=http://datasheets.avx.com/X7RDielectric.pdf, componentlink2description="DigiKey Link", componentlink2url=http://digikey.com/product-detail/en/avx-corporation/12101C105MAT2A/478-2571-1-ND/717516, lastupdated="9/2/2020 1:10:52 AM", Lifecycle Status=Active, Minimum Order=1, Mounting Type="Surface Mount, MLCC", Package / Case="1210 (3225 Metric)", packaging=TapeAndReel, Part Number=12101C105MAT2A, Part Status=Active, partid=23736, price=0.21, series=-, Size / Dimension="0.126\" L x 0.098\" W (3.20mm x 2.50mm)", Supplier 1=DigiKey, Thickness (Max)="0.110\" (2.79mm)"
C?: library part C1206C223K1RECAUTO, "CAP CER 1206 22NF 100V X7R 10%", Device Package="1206 (3216 Metric)", manufacturer=KEMET, Operating Temperature="-55°C ~ 125°C", Ratings=AEC-Q200, Supplier Part Number 1=399-17898-1-ND, Temperature Coefficient=X7R, Tolerance=±10%, Voltage - Rated=100V, Applications="Automotive, ESD Protection", Capacitance="0.022 µF", componentlink1description=Datasheet, componentlink1url=https://api.kemet.com/component-edge/download/datasheet/C1206C223K1RECAUTO.pdf, componentlink2description="DigiKey Link", componentlink2url=https://www.digikey.com/en/products/detail/kemet/C1206C223K1RECAUTO/8640492, lastupdated="2/6/2023 8:14:07 PM", Lifecycle Status=Active, Minimum Order=1, Mounting Type="Surface Mount, MLCC", Package / Case="1206 (3216 Metric)", packaging=TapeAndReel, Part Number=C1206C223K1RECAUTO, Part Status=Active, partid=21022, price=0.03, series="ESD SMD Auto X7R", Size / Dimension="0.126\" L x 0.063\" W (3.20mm x 1.60mm)", Supplier 1=DigiKey, Thickness (Max)="0.035\" (0.88mm)"
C?: library part 12063G225ZAT4A, "CAP CER 2.2UF 25V Y5V 1206", Device Package="1206 (3216 Metric)", manufacturer="AVX Corporation", Operating Temperature="-30°C ~ 85°C", Supplier Part Number 1=478-12479-1-ND, Temperature Coefficient="Y5V (F)", Tolerance="-20%, +80%", Voltage - Rated=25V, Applications="General Purpose", Capacitance=2.2µF, componentlink1description=Datasheet, componentlink1url=http://datasheets.avx.com/Y5V.pdf, componentlink2description="DigiKey Link", componentlink2url=http://digikey.com/product-detail/en/avx-corporation/12063G225ZAT4A/478-12479-1-ND/9749331, lastupdated="9/2/2020 1:05:10 AM", Lifecycle Status=Active, Minimum Order=1, Mounting Type="Surface Mount, MLCC", Package / Case="1206 (3216 Metric)", packaging=TapeAndReel, Part Number=12063G225ZAT4A, Part Status=Active, partid=18984, price=0.09, series=-, Size / Dimension="0.126\" L x 0.063\" W (3.20mm x 1.60mm)", Supplier 1=DigiKey, Thickness (Max)="0.040\" (1.02mm)"
C? C? C?: library part GRM21BD72A225KE01L, "CAP CER 2.2UF 100V X7T 0805", Device Package="0805 (2012 Metric)", manufacturer="Murata Electronics", Operating Temperature="-55°C ~ 125°C", Supplier Part Number 1=490-GRM21BD72A225KE01LCT-ND, Temperature Coefficient=X7T, Tolerance=±10%, Voltage - Rated=100V, Applications="General Purpose", Capacitance="2.2 µF", componentlink1description=Datasheet, componentlink1url=https://search.murata.co.jp/Ceramy/image/img/A01X/G101/ENG/GRM21BD72A225KE01-01A.pdf, componentlink2description="DigiKey Link", componentlink2url=https://www.digikey.com/en/products/detail/murata-electronics/GRM21BD72A225KE01L/16033492, lastupdated="2/6/2023 8:10:57 PM", Lifecycle Status=Active, Minimum Order=1, Mounting Type="Surface Mount, MLCC", Package / Case="0805 (2012 Metric)", packaging=TapeAndReel, Part Number=GRM21BD72A225KE01L, Part Status=Active, partid=42420, price=0.13, series=GRM, Size / Dimension="0.079\" L x 0.049\" W (2.00mm x 1.25mm)", Supplier 1=DigiKey, Thickness (Max)="0.057\" (1.45mm)"
C? C?: library part CC0603CRNPO9BN9R0, "CAP CER 9PF 50V C0G/NPO 0603", Device Package="0603 (1608 Metric)", manufacturer=Yageo, Operating Temperature="-55°C ~ 125°C", Supplier Part Number 1=311-3866-1-ND, Temperature Coefficient="C0G, NP0", Tolerance=±0.25pF, Voltage - Rated=50V, Applications="General Purpose", Capacitance="9 pF", componentlink1description=Datasheet, componentlink1url=https://www.yageo.com/upload/media/product/productsearch/datasheet/mlcc/UPY-GP_NP0_16V-to-50V_17.pdf, componentlink2description="DigiKey Link", componentlink2url=https://www.digikey.com/en/products/detail/yageo/CC0603CRNPO9BN9R0/5883464, lastupdated="2/6/2023 8:08:52 PM", Lifecycle Status=Active, Minimum Order=1, Mounting Type="Surface Mount, MLCC", Package / Case="0603 (1608 Metric)", packaging=TapeAndReel, Part Number=CC0603CRNPO9BN9R0, Part Status=Active, partid=2329, price=0.01, series=CC, Size / Dimension="0.063\" L x 0.031\" W (1.60mm x 0.80mm)", Supplier 1=DigiKey, Thickness (Max)="0.035\" (0.90mm)"
C? C?: library part 06033A180JAT2A, "CAP CER 18PF 25V C0G/NP0 0603", Device Package="0603 (1608 Metric)", manufacturer="AVX Corporation", Operating Temperature="-55°C ~ 125°C", Supplier Part Number 1=478-12677-1-ND, Temperature Coefficient="C0G, NP0", Tolerance=±5%, Voltage - Rated=25V, Applications="General Purpose", Capacitance=18pF, componentlink1description=Datasheet, componentlink1url=http://datasheets.avx.com/C0GNP0-Dielectric.pdf, componentlink2description="DigiKey Link", componentlink2url=http://digikey.com/product-detail/en/avx-corporation/06033A180JAT2A/478-12677-1-ND/9949213, lastupdated="9/2/2020 1:03:34 AM", Lifecycle Status=Active, Minimum Order=1, Mounting Type="Surface Mount, MLCC", Package / Case="0603 (1608 Metric)", packaging=TapeAndReel, Part Number=06033A180JAT2A, Part Status=Active, partid=3088, price=0.04, series=-, Size / Dimension="0.063\" L x 0.032\" W (1.60mm x 0.81mm)", Supplier 1=DigiKey, Thickness (Max)="0.035\" (0.90mm)"
C? C?: library part CC0603ZRY5V7BB225, "CAP CER 2.2UF 16V Y5V 0603", Device Package="0603 (1608 Metric)", manufacturer=Yageo, Operating Temperature="-30°C ~ 85°C", Supplier Part Number 1=311-3416-1-ND, Temperature Coefficient="Y5V (F)", Tolerance="-20%, +80%", Voltage - Rated=16V, Applications="General Purpose", Capacitance="2.2 µF", componentlink1description=Datasheet, componentlink1url=http://www.yageo.com/documents/recent/UPY-GPHC_Y5V_6.3V-to-50V_8.pdf, componentlink2description="DigiKey Link", componentlink2url=https://www.digikey.com/en/products/detail/yageo/CC0603ZRY5V7BB225/5883851, lastupdated="2/6/2023 8:08:53 PM", Lifecycle Status=Active, Minimum Order=1, Mounting Type="Surface Mount, MLCC", Package / Case="0603 (1608 Metric)", packaging=TapeAndReel, Part Number=CC0603ZRY5V7BB225, Part Status=Active, partid=2203, price=0.01, series=CC, Size / Dimension="0.063\" L x 0.031\" W (1.60mm x 0.80mm)", Supplier 1=DigiKey, Thickness (Max)="0.035\" (0.90mm)"
C? C?: library part C0603X103K1RAC3316, "CAP CER 0603 10NF 100V X7R", Device Package="0603 (1608 Metric)", manufacturer=KEMET, Operating Temperature="-55°C ~ 125°C", Ratings=AEC-Q200, Supplier Part Number 1=399-C0603X103K1RAC3316CT-ND, Temperature Coefficient=X7R, Tolerance=±10%, Voltage - Rated=100V, Applications="Automotive, Boardflex Sensitive", Capacitance="10000 pF", componentlink1description=Datasheet, componentlink1url=https://api.kemet.com/component-edge/download/datasheet/C0603X103K1RAC3316.pdf, componentlink2description="DigiKey Link", componentlink2url=https://www.digikey.com/en/products/detail/kemet/C0603X103K1RAC3316/10315782, Features="Soft Termination", lastupdated="2/6/2023 8:08:35 PM", Lifecycle Status=Active, Minimum Order=1, Mounting Type="Surface Mount, MLCC", Package / Case="0603 (1608 Metric)", packaging=TapeAndReel, Part Number=C0603X103K1RAC3316, Part Status=Active, partid=8591, price=0.07, series="SMD Auto X7R VW80808", Size / Dimension="0.063\" L x 0.031\" W (1.60mm x 0.80mm)", Supplier 1=DigiKey, Thickness (Max)="0.037\" (0.95mm)"
D?: library part CMP-14398-000007-1, "DIODE ARRAY SCHOTTKY 30V SOT23", Ambient Temperature Range High=+150°C, Ambient Temperature Range Low=-55°C, Capacitance=10pF, Forward Current=200mA, manufacturer=Nexperia, Max Surge Forward Current=600mA, Package=SOT23, Peak Reverse Current=2uA, Reverse Voltage=30V, Temperature="to +150°C", Automotive=Yes, Automotive Grade="Grade 0", Category=Diode, componentlink2description=Datasheet, componentlink2url=https://assets.nexperia.com/documents/data-sheet/BAT54_SER.pdf, Device Class L1="Discrete Semiconductors", Device Class L2=Diodes, Device Class L3="Schottky Diodes", Digikey Description="DIODE ARRAY SCHOTTKY 30V SOT23", Footprint Url=https://assets.nexperia.com/documents/outline-drawing/SOT23.pdf, Height=1.1mm, Ipc Land Pattern Name=SOT95P230X100-3, Lead Free=Yes, Manufacturer Part Number=BAT54C,215, Max Junction Temp=+150°C, Mouser Description="Schottky Diodes, Rectifiers - Arrays SOT-23 (TO-236AB) 30V 200mA (DC) Surface Mount", Octopart=https://octopart.com/bat54c%2C215-nexperia-78738945, RoHS=TRUE, Temperature Range High=+150°C
D? D? D?: library part CMP-2000-05198-2, "LED GREEN CLEAR SMD", Case Code (Imperial)=0603, Case Code (Metric)=1608, Color=Green, Forward Current=30mA, Forward Voltage=2V, Lens Color=Colorless, Max Operating Temperature=85°C, Max Power Dissipation=75mW, Min Operating Temperature=-55°C, Package Quantity=1, Reverse Voltage=5V, Test Current=20mA, Case/Package=0603, Depth=0.8mm, Dominant Wavelength=571nm, Height=0.55mm, Illumination Color=Green, Lead Free="Lead Free", Length=1.6mm, Lens Style=Rectangular, Lens Transparency=Clear, Luminous Intensity=35mcd, Mount="Surface Mount", Number of Elements=1, Number of LEDs=1, Number of Pins=2, packaging="Tape and Reel", Power Dissipation=75mW, Power Rating=75mW, Radiation Hardening=No, Viewing Angle=130°, Wavelength=574nm, Width=0.8mm
D?: "Diode", Manufacturer_Name="ROHM Semiconductor", Mouser Part Number=755-RB050LAM-30TFTR, Datasheet Link=https://componentsearchengine.com/Datasheets/1/RB050LAM-30TFTR.pdf, Height=0.95mm, Manufacturer_Part_Number=RB050LAM-30TFTR, Mouser Price/Stock=https://www.mouser.co.uk/ProductDetail/ROHM-Semiconductor/RB050LAM-30TFTR?qs=HXFqYaX1Q2xO84kRCTSWAQ%3D%3D
D? D?: library part CMP-2000-05191-1, "TVS Diode Array, 30 pF, 30 KV, -40 to 85 degC, 4-Pin SOT143, RoHS, Tape and Reel", Capacitance Value=30pF, Clamping Voltage=8V, Leakage Current=0.1uA, manufacturer=Littelfuse, Operating Temp Range=-40Cto85C, Operating Temperature Classification=Industrial, Operating Temperature Max Deg. C=85C, Operating Temperature Min Deg. C=-40C, Package / Case=SOT-143, Reverse Stand-off Voltage=5.5(Min)V, Working Voltage=5.5V, Working Voltage (Max)=5.5V(Min), Clamping Voltage (Max)=8V, Configuration=Triple, Datasheet URL=https://datasheet.ciiva.com/15143/getdatasheetpartid-116020-15143550.pdf, Datasheet Version=Dec-13, Direction Type=Uni-Directional, Leakage Current (Max)=0.1uA, Manufacturer URL=http://www.littelfuse.com/, Mounting=SurfaceMount, Mounting Style=SurfaceMount, Number of Elements=3, Package Type=SOT-143, packaging=TapeandReel, Pin Count=3+Tab, Polarity=Uni-Directional, Product Depth (mm)=1.4mm, Product Height (mm)=1.05mm, Product Length (mm)=3.04mm, Rad Hardened=No, Suppressor Type=TVS
F?: "Fuse", Manufacturer_Name=BelFuse, Mouser Part Number=530-0ZRM0375FF1A, Datasheet Link=https://www.mouser.com/datasheet/2/643/ds-CP-0zrm-series-1664109.pdf, Height=34mm, Manufacturer_Part_Number=0ZRM0375FF1A, Mouser Price/Stock=https://www.mouser.co.uk/ProductDetail/Bel-Fuse/0ZRM0375FF1A?qs=MvPYbBWWJyvr16E%252BkpbJXQ%3D%3D
F?: "Resettable Fuse", Manufacturer_Name=LITTELFUSE, Mouser Part Number=576-0805L110SLYR, Arrow Part Number=0805L110SLYR, Arrow Price/Stock=https://www.arrow.com/en/products/0805l110slyr/littelfuse?region=nac, Datasheet Link=https://m.littelfuse.com/~/media/electronics/datasheets/resettable_ptcs/littelfuse_ptc_lorho_datasheet.pdf.pdf, Height=0.75mm, Manufacturer_Part_Number=0805L110SLYR, Mouser Price/Stock=https://www.mouser.co.uk/ProductDetail/Littelfuse/0805L110SLYR?qs=EWTG4QeKclHL0DPYhJ7mhQ%3D%3D
IC?: "Integrated Circuit", Manufacturer_Name="Trinamic Motion Control GmbH", Datasheet Link=https://datasheet.datasheetarchive.com/originals/distributors/Datasheets_SAMA/f9acd441643b32190a486ba2a99356a2.pdf, Height=1.2mm, Manufacturer_Part_Number=TMC6200-TA
IC?: "Integrated Circuit", Manufacturer_Name=onsemi, Mouser Part Number=863-NCP692MN33T2G, Arrow Part Number=NCP692MN33T2G, Arrow Price/Stock=https://www.arrow.com/en/products/ncp692mn33t2g/on-semiconductor?region=nac, Datasheet Link=http://www.onsemi.com/pub/Collateral/NCP690-D.PDF, Height=1mm, Manufacturer_Part_Number=NCP692MN33T2G, Mouser Price/Stock=https://www.mouser.co.uk/ProductDetail/onsemi/NCP692MN33T2G?qs=qq0d0g5Qxs2BIvd8Sor9Ug%3D%3D
J? J?: "Connector", Manufacturer_Name=Molex, Mouser Part Number=N/A
  J?: Arrow Part Number=0399100103, Arrow Price/Stock=https://www.arrow.com/en/products/0399100103/molex?region=nac, Datasheet Link=https://www.molex.com/pdm_docs/sd/399100103_sd.pdf, Height=30mm, Manufacturer_Part_Number=0399100103, Mouser Price/Stock=https://www.mouser.co.uk/ProductDetail/Molex/0399100103?qs=%252BdQmOuGyFcE%2Fyr5UJhNqQA%3D%3D
  J?: Arrow Part Number=0399100102, Arrow Price/Stock=https://www.arrow.com/en/products/0399100102/molex, Datasheet Link=https://www.molex.com/pdm_docs/sd/399100102_sd.pdf, Height=29.7mm, Manufacturer_Part_Number=0399100102, Mouser Price/Stock=https://www.mouser.co.uk/ProductDetail/Molex/0399100102?qs=PBcRNPEHKso3EAnX8hJm1w%3D%3D
J? J?: "USB-C (USB TYPE-C) USB 2.0 Receptacle Connector 24 (16+8 Dummy) Position Surface Mount, Right Angle; Through Hole", Package=None, Availability="In Stock", Check_prices=https://www.snapeda.com/parts/USB4110-GF-A/Global+Connector+Technology/view-part/?ref=eda, MF=GCT, MP=USB4110-GF-A, price=None, Purchase-URL=https://pricing.snapeda.com/search/part/USB4110-GF-A/?ref=eda, SnapEDA_Link=https://www.snapeda.com/parts/USB4110-GF-A/Global+Connector+Technology/view-part/?ref=snap
L?: library part CMP-006-00004-3, "Chip Ferrite Bead for General Use, 120 Ohm, 500 mA, -55 to 125 degC, 0603 (1608 Metric), RoHS, Tape and Reel", Case/Package=0603, Current Rating=500mA, manufacturer=Murata, Max Operating Temperature=125°C, Min Operating Temperature=-55°C, Package Quantity=4000, Package Reference=BLM18_H950-2, Resistance=200mohm, Tolerance=25%, Core Material=Ferrite, Datasheet URL=https://statics3.seeedstudio.com/images/opl/datasheet/303010016.pdf, Datasheet Version=Jun-12, Impedance=120Ohm, Max Current Rating=500mA, packaging=TapeandReel, RoHS Compliant=True
L?: library part CMP-06042-017025-1, "Multilayer Type Inductor for Power Lines, 0805 (2012), 4.7μH, 20%, 0.288Ω, 0.8A", Case Code (Imperial)=0805, Case Code (Metric)=2012, Current Rating=800mA, DC Resistance (DCR)=288mR, Inductance=4.7uH, Max Operating Temperature=125°C, Min Operating Temperature=-55°C, Package Quantity=4000, Self Resonant Frequency=30MHz, Test Frequency=1MHz, Tolerance=20%, Case/Package=0805, Core Material=Ferrite, Height - Seated (Max)=0.039inch, Length=0.079inch, Mount="Surface Mount", packaging="Cut Tape", RoHS Compliant=Yes, Shielding=Shielded, Width=0.049inch
P? P? P?: "Header, 4-Pin", LatestRevisionDate=17-Jul-2002, LatestRevisionNote="Re-released for DXP Platform.", Publisher="Altium Limited"
P? P?: "Header, 5-Pin", LatestRevisionDate=17-Jul-2002, LatestRevisionNote="Re-released for DXP Platform.", Publisher="Altium Limited"
P?: "Header, 8-Pin", LatestRevisionDate=17-Jul-2002, LatestRevisionNote="Re-released for DXP Platform.", Publisher="Altium Limited"
PS?: "Power Supply", Manufacturer_Name="CUI Inc.", Mouser Part Number=490-V7812W-500R, Arrow Part Number=V7812W-500R, Arrow Price/Stock=https://www.arrow.com/en/products/v7812w-500r/cui-inc, Datasheet Link=https://www.cui.com/product/resource/v78xx-1000.pdf, Height=9mm, Manufacturer_Part_Number=V7812W-500R, Mouser Price/Stock=https://www.mouser.co.uk/ProductDetail/CUI-Inc/V7812W-500R?qs=WyjlAZoYn5223%2F9I6AQjMw%3D%3D
Q? Q? Q? Q? Q? Q?: library part CMP-32901-001127-1, "MOSFET N-CH 80V 120A D2PAK", Case/Package=TO-263-3, Continuous Drain Current (ID)=120A, Drain to Source Breakdown Voltage=80V, Drain to Source Resistance=4.1mR, Gate to Source Voltage (Vgs)=20V, Input Capacitance=6.24nF, Max Operating Temperature=175°C, Max Power Dissipation=167W, Min Operating Temperature=-55°C, Package Quantity=1000, Drain to Source Voltage (Vdss)=80V, Element Configuration=Single, Fall Time=12ns, Halogen Free="Halogen Free", Lead Free="Contains Lead", Max Dual Supply Voltage=80V, Mount="Surface Mount", Number of Channels=1, Number of Pins=3, packaging="Tape and Reel", Polarity=N-CHANNEL, Rds On Max=3.1mR, Rise Time=18ns, RoHS Compliant=Yes, series=OptiMOS™, Turn-Off Delay Time=37ns, Turn-On Delay Time=18ns, Weight=0.139332oz
Q?: "MOSFET (P-Channel)", Manufacturer_Name="Diodes Inc.", Mouser Part Number=621-DMP3125L-7, Arrow Part Number=DMP3125L-7, Arrow Price/Stock=https://www.arrow.com/en/products/dmp3125l-7/diodes-incorporated, Datasheet Link=http://uk.rs-online.com/web/p/products/1826917, Height=1.1mm, Manufacturer_Part_Number=DMP3125L-7, Mouser Price/Stock=https://www.mouser.co.uk/ProductDetail/Diodes-Incorporated/DMP3125L-7?qs=W0yvOO0ixfH8ma8MdHfXQA%3D%3D
R? R? R? R? R? R?: library part RK73B2ETTD1R0J, "RES 1 OHM 5% 1/2W 1210", Device Package="1210 (3225 Metric)", manufacturer="KOA Speer Electronics, Inc.", Operating Temperature="-55°C ~ 155°C", Power (Watts)="0.5W, 1/2W", Ratings=AEC-Q200, Supplier Device Package=1210, Supplier Part Number 1=2019-RK73B2ETTD1R0JCT-ND, Temperature Coefficient=±200ppm/°C, Tolerance=±5%, componentlink1description=Datasheet, componentlink1url=http://www.koaspeer.com/catimages/Products/RK73B/RK73B.pdf, componentlink2description="DigiKey Link", componentlink2url=https://www.digikey.com/en/products/detail/koa-speer-electronics-inc/RK73B2ETTD1R0J/10315032, Composition="Thick Film", Features="Automotive AEC-Q200", Height - Seated (Max)="0.028\" (0.70mm)", lastupdated="2/6/2023 9:02:08 PM", Lifecycle Status=Active, Minimum Order=1, Number of Terminations=2, Package / Case="1210 (3225 Metric)", packaging=TapeAndReel, Part Number=RK73B2ETTD1R0J, Part Status=Active, price=0.02, Resistance="1 Ohms", series=RK73B, Size / Dimension="0.126\" L x 0.063\" W (3.20mm x 1.60mm)", Supplier 1=DigiKey
R? R? R?: library part RN73R2ETTD10R0F25, "RESISTOR THIN FILM 1210 SIZE", Device Package="1210 (3225 Metric)", manufacturer="KOA Speer Electronics, Inc.", Operating Temperature="-55°C ~ 155°C", Power (Watts)="0.25W, 1/4W", Ratings=AEC-Q200, Supplier Device Package=1210, Supplier Part Number 1=2019-RN73R2ETTD10R0F25CT-ND, Temperature Coefficient=±25ppm/°C, Tolerance=±1%, componentlink1description=Datasheet, componentlink1url=https://www.koaspeer.com/pdfs/RN73R.pdf, componentlink2description="DigiKey Link", componentlink2url=https://www.digikey.com/en/products/detail/koa-speer-electronics-inc/RN73R2ETTD10R0F25/13211390, Composition="Metal Film", Features="Automotive AEC-Q200, Moisture Resistant", Height - Seated (Max)="0.028\" (0.70mm)", lastupdated="2/6/2023 9:02:05 PM", Lifecycle Status=Active, Minimum Order=1, Number of Terminations=2, Package / Case="1210 (3225 Metric)", packaging=TapeAndReel, Part Number=RN73R2ETTD10R0F25, Part Status=Active, price=0.16, Resistance="10 Ohms", series=RN73R, Size / Dimension="0.126\" L x 0.098\" W (3.20mm x 2.50mm)", Supplier 1=DigiKey
R?: library part AC0603FR-07120RL, "RES SMD 120 OHM 1% 1/10W 0603", Device Package="0603 (1608 Metric)", manufacturer=Yageo, Operating Temperature="-55°C ~ 155°C", Power (Watts)="0.1W, 1/10W", Ratings=AEC-Q200, Supplier Device Package=0603, Supplier Part Number 1=YAG3563CT-ND, Temperature Coefficient=±100ppm/°C, Tolerance=±1%, componentlink1description=Datasheet, componentlink1url=https://www.yageo.com/upload/media/product/productsearch/datasheet/rchip/PYu-AC_51_RoHS_L_7.pdf, componentlink2description="DigiKey Link", componentlink2url=https://www.digikey.com/en/products/detail/yageo/AC0603FR-07120RL/5895761, Composition="Thick Film", Features="Automotive AEC-Q200, Moisture Resistant", Height - Seated (Max)="0.022\" (0.55mm)", lastupdated="2/5/2023 8:27:27 PM", Lifecycle Status=Active, Minimum Order=1, Number of Terminations=2, Package / Case="0603 (1608 Metric)", packaging=CutTape, Part Number=AC0603FR-07120RL, Part Status=Active, partid=17447, price=0.01, Resistance="120 Ohms", series=AC, Size / Dimension="0.063\" L x 0.031\" W (1.60mm x 0.80mm)", Supplier 1=DigiKey
R?: library part CPF0603B10RE, "RES SMD 10 OHM 0.1% 1/16W 0603", Device Package="0603 (1608 Metric)", manufacturer="TE Connectivity Passive Product", Operating Temperature="-55°C ~ 155°C", Power (Watts)="0.063W, 1/16W", Supplier Device Package=0603, Supplier Part Number 1=A119908CT-ND, Temperature Coefficient=±25ppm/°C, Tolerance=±0.1%, componentlink1description=Datasheet, componentlink1url=https://www.te.com/commerce/DocumentDelivery/DDEController?Action=srchrtrv&DocNm=1773200&DocType=DS&DocLang=English, componentlink2description="DigiKey Link", componentlink2url=https://www.digikey.com/en/products/detail/te-connectivity-passive-product/CPF0603B10RE/2381853, Composition="Thin Film", Height - Seated (Max)="0.022\" (0.55mm)", lastupdated="2/5/2023 8:28:11 PM", Lifecycle Status=Active, Minimum Order=1, Number of Terminations=2, Package / Case="0603 (1608 Metric)", packaging=TapeAndReel, Part Number=CPF0603B10RE, Part Status=Active, partid=4879, price=0.09, Resistance="10 Ohms", series="CPF, Neohm", Size / Dimension="0.061\" L x 0.031\" W (1.55mm x 0.80mm)", Supplier 1=DigiKey
R? R? R? R?: library part AT0603DRD07100KL, "RES SMD 100K OHM 0.5% 1/10W 0603", Device Package="0603 (1608 Metric)", manufacturer=Yageo, Operating Temperature="-55°C ~ 155°C", Power (Watts)="0.1W, 1/10W", Ratings=AEC-Q200, Supplier Device Package=0603, Supplier Part Number 1=311-2103-1-ND, Temperature Coefficient=±25ppm/°C, Tolerance=±0.5%, componentlink1description=Datasheet, componentlink1url=http://www.yageo.com/documents/recent/PYu-AT_51_RoHS_L_5.pdf, componentlink2description="DigiKey Link", componentlink2url=https://www.digikey.com/en/products/detail/yageo/AT0603DRD07100KL/5908403, Composition="Thin Film", Features="Anti-Sulfur, Automotive AEC-Q200, Moisture Resistant", Height - Seated (Max)="0.022\" (0.55mm)", lastupdated="2/5/2023 8:28:10 PM", Lifecycle Status=Active, Minimum Order=1, Number of Terminations=2, Package / Case="0603 (1608 Metric)", packaging=TapeAndReel, Part Number=AT0603DRD07100KL, Part Status=Active, partid=4903, price=0.02, Resistance="100 kOhms", series=AT, Size / Dimension="0.063\" L x 0.031\" W (1.60mm x 0.80mm)", Supplier 1=DigiKey